# Altium PCB SW3 Jacks.PcbDoc
Units mm, origin at the board's own origin, x right, y up, seen from the top; angles counter-clockwise.
Board outline 19.46 x 86.99 mm, 2 copper layers (Top Layer, Bottom Layer), stack 1.58 mm thick; 14 components, 14 nets, 55 pads, 7 vias.
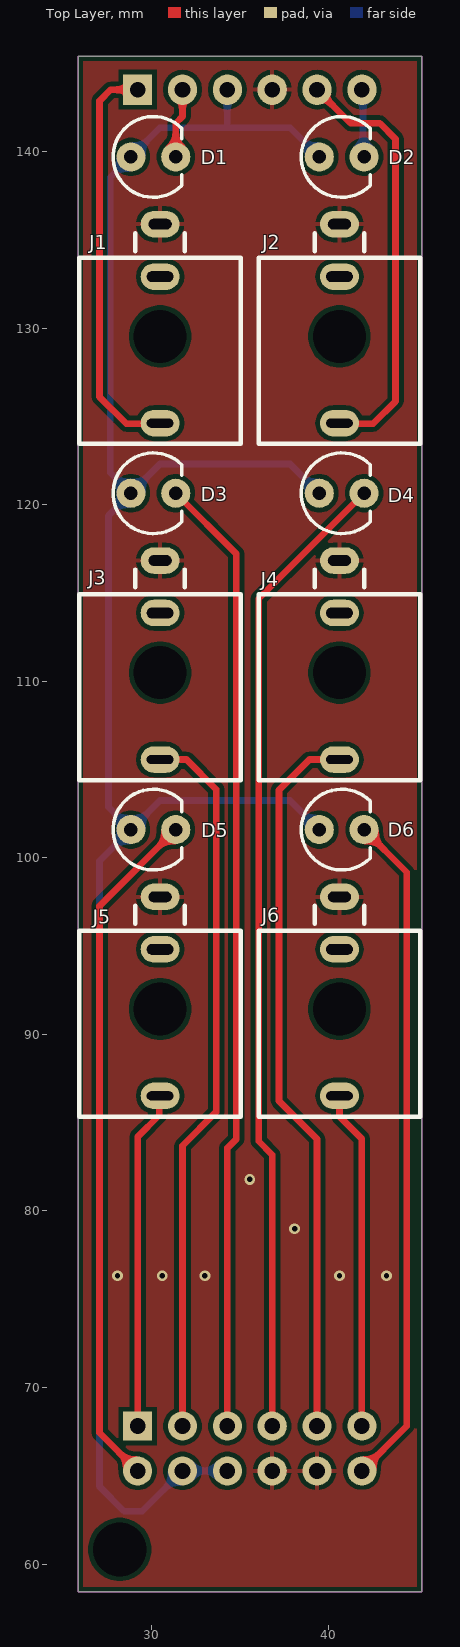
[diagram p0: Top Layer view]
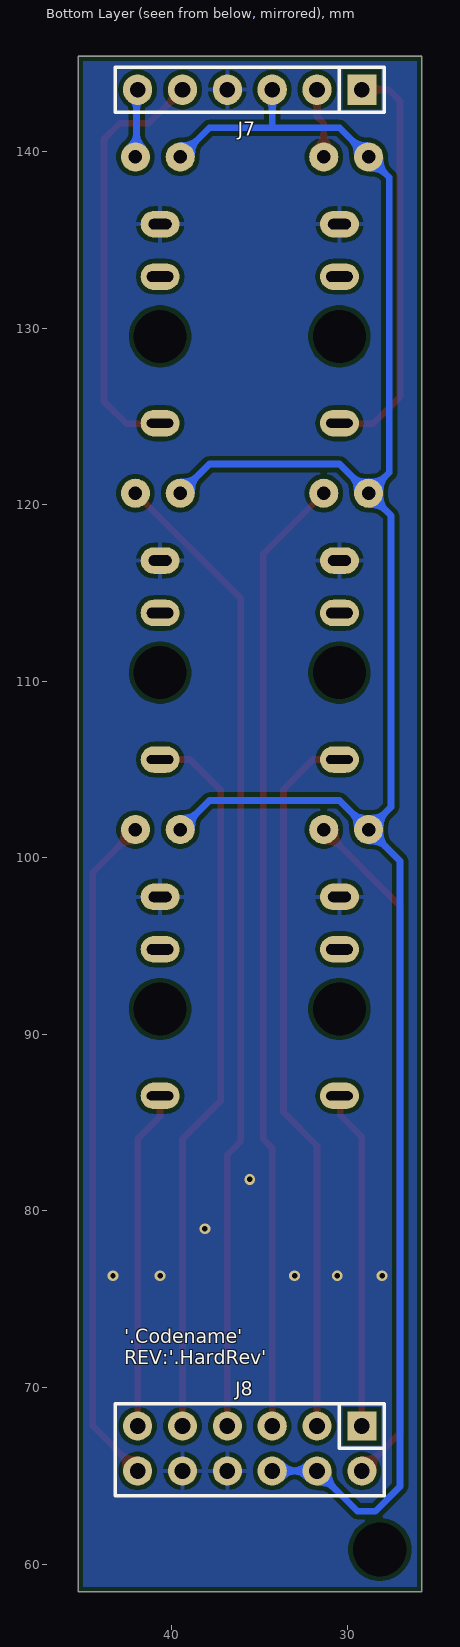
[diagram p1: Bottom Layer view, seen from below]
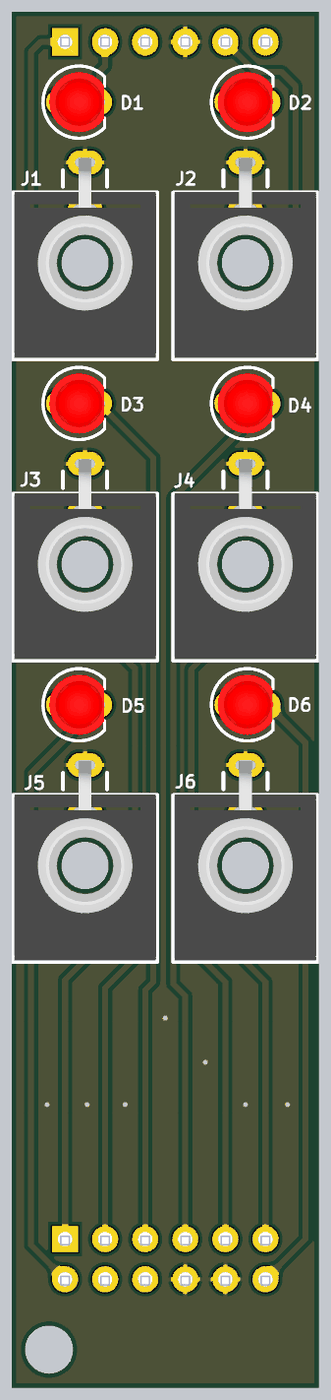
[diagram p2: 3D render of the assembled board from above, using the file's embedded part models]

## Layer stack, top to bottom
Top Solder: solder mask 0.0102, Solder Resist, Dk 3.5
Top Layer: signal copper 0.0356
Dielectric 1: dielectric 1.5086, FR-4, Dk 4.8
Bottom Layer: signal copper 0.0356
Bottom Solder: solder mask 0.0102, Solder Resist, Dk 3.5

## Board outline
25.832,58.42 45.288,58.42 45.288,145.415 25.832,145.415

## Design rules (kind name [scope] priority, off if disabled: settings)
Clearance [All] p1: gap=0.254 ignorepadtopadclearanceinfootprint=FALSE except(0: Arc-Hole Track-Hole SMDPad-Hole THPad-Hole Via-Hole Fill-Hole Poly-Hole Region-Hole Text-Hole)
HoleSize [All] p1: absolutevalues=TRUE maxlimit=2539.975 minlimit=0.025 maxpercent=80.000 minpercent=20.000
PolygonConnect [All] p1: thpad.connectstyle=Relief thpad.reliefconductorwidth=0.254 thpad.reliefentries=4 thpad.polygonreliefangle="90 Angle" thpad.airgapwidth=0.254 smdpad.connectstyle=Relief smdpad.reliefconductorwidth=0.254 smdpad.reliefentries=4 smdpad.polygonreliefangle="90 Angle" smdpad.airgapwidth=0.254 via.connectstyle=Direct via.reliefconductorwidth=0.254 via.reliefentries=4 via.polygonreliefangle="90 Angle" via.airgapwidth=0.254
RoutingVias [All] p1: holewidth=0.711 width=1.27 viastyle="Through Hole" minholewidth=0.711 minwidth=1.27 maxholewidth=0.711 maxwidth=1.27
SilkToSilkClearance [All] p1: silktosilkclearance=0
SilkToSolderMaskClearance [IsPad] p1: minsilkscreentomaskgap=0.025 clearancetoexposedcopper=TRUE
SolderMaskExpansion [All] p1: expansion=0.102 istentingtop=FALSE
Width [All] p1: maxlimit=25.4 minlimit=0.127 preferedwidth=0.254
27 further rules are at their usual default settings.

## Components (designator, comment, footprint, x,y, rotation, side; value= is the part's Value field where it differs from the comment)
D1 "RED" LED_3MM_TH 30.099,139.7 r0 top
D2 "RED" LED_3MM_TH 40.767,139.7 r0 top
D3 "RED" LED_3MM_TH 30.099,120.65 r0 top
D4 "RED" LED_3MM_TH 40.767,120.65 r0 top
D5 "RED" LED_3MM_TH 30.099,101.6 r0 top
D6 "RED" LED_3MM_TH 40.767,101.6 r0 top
J1 "WQP-WQP518MA" PJ301M-12 30.48,129.54 r180 top
J2 "WQP-WQP518MA" PJ301M-12 40.64,129.54 r180 top
J3 "WQP-WQP518MA" PJ301M-12 30.48,110.49 r180 top
J4 "WQP-WQP518MA" PJ301M-12 40.64,110.49 r180 top
J5 "WQP-WQP518MA" PJ301M-12 30.48,91.44 r180 top
J6 "WQP-WQP518MA" PJ301M-12 40.64,91.44 r180 top
J7 "PH1-06-UA" ADAM_TECH_PH1-06-UA 35.56,143.51 r0 bottom
J8 "PH2-12-UA" ADAM_TECH_PH2-12-UA 35.56,66.548 r0 bottom

## Footprints (in the part's own frame and the unit in brackets; to place one, negate y for a bottom-side part, rotate by r counter-clockwise, add the part's x,y. Pads: shape width x height; smd on the part's side, far side on the other; paste and mask are expansions set on the pad)
ADAM_TECH_PH1-06-UA [mil]
  rect 65x68 hole 35: 1(-250,0)
  oval 65x68 hole 35: 2(-150,0) 3(-50,0) 4(50,0) 5(150,0) 6(250,0)
  silkscreen extent -300,-50 300,50, body extent -300,-49 300,49, height 335
ADAM_TECH_PH2-12-UA [mil]
  rect 65x65 hole 35: 1(-250,-50)
  round 65 hole 35: 2(-250,50) 3(-150,-50) 4(-150,50) 5(-50,-50) 6(-50,50) 7(50,-50) 8(50,50) 9(150,-50) 10(150,50) 11(250,-50) 12(250,50)
  silkscreen extent -300,-100 300,105, body extent -300,-95 300,102, height 334
LED_3MM_TH [mil]
  round 65 hole 30: 1(-50,0) 2(50,0)
  silkscreen extent -90,-90 64,90, body extent -75,-75 63,75, height 316
PJ301M-12 [mm] "Moddeled after QingPu WQP-WQP518MA"
  round 0.025 hole 3 unplated: 0(0,0)
  oval 2.2x1.5 hole 0.6 slot 1.3 at 0 deg: 1(0,-6.35)
  oval 2.2x1.5 hole 0.6 slot 1.5 at 0 deg: 2(0,-3.38)
  oval 2.2x1.5 hole 0.5 slot 1.5 at 0 deg: 3(0,4.92)
  silkscreen extent -4.57,-5.84 4.57,6.1, body extent -4.5,-6.62 4.5,6.01, height 14.52

## Part data
D1 D2 D3 D4 D5 D6: library part 151033RS03000, "LED RED CLEAR 3MM ROUND T/H", Color=Red, Manufacturer="Würth Elektronik", Supplier Part Number 1=732-5013-ND, Datasheets=https://www.we-online.com/katalog/datasheet/151033RS03000.pdf, Manufacturer Part Number=151033RS03000, PartNumber=151033RS03000, Supplier 1=Digi-Key, Supplier 2=Mouser, Supplier Part Number 2=710-151033RS03000
J1 J2 J3 J4 J5 J6: "CONN 3.5mm VIRTICAL MONO w/ NORMAL", Manufacturer=QingPu, Connector Type="Phone Jack", Gender=Female, HelpURL=http://www.qingpu-electronics.com/en/products/WQP-PJ398SM-362.html, Manufacturer Part Number=WQP-WQP518MA, PartNumber=WQP-WQP518MA, Signal Lines=Mono, Supplier 1=QingPu, Supplier Part Number 1=WQP-WQP518MA
J7: "CONN HEADER VERT 6POS 2.54MM", Manufacturer="Adam Tech", Supplier Part Number 1=2057-PH1-06-UA-ND, HelpURL=https://app.adam-tech.com/products/download/data_sheet/201605/ph1-xx-ua-data-sheet.pdf, Manufacturer Part Number=PH1-06-UA, PartNumber=PH1-06-UA, Supplier 1=Digi-Key, Supplier 2=Mouser
J8: "CONN HEADER 12POS DUAL VERT PCB", Manufacturer="Adam Tech", Supplier Part Number 1=2057-PH2-12-UA-ND, HelpURL=https://app.adam-tech.com/products/download/data_sheet/202065/ph2-xx-ua-data-sheet.pdf, Manufacturer Part Number=PH2-12-UA, PartNumber=PH2-12-UA, Supplier 1=Digi-Key, Supplier 2=Mouser

## Free pads (board coordinates)
  round 1.524 hole 3.048 unplated: 0(28.194,60.833)

## Via types
v1: diameter 0.61, hole 0.305, Top Layer to Bottom Layer, tented both sides, 7 vias

## Nets (pads, with @x,y where several pads share a name; then routed paths per layer and width w, separated by ;. In a path a pad name is that pad's centre, name@x,y a point inside that pad or via, vN(x,y) a via of type N, cw(c..) or ccw(c..) an arc to the next point about the centre after c; other vN are vias at no path point)
+12V: D1.1 D2.1 D3.1 D4.1 D5.1 D6.1 J7.3 J8.4 J8.6 | length 125.2
  Bottom Layer w0.381: J8.6 J8.4 29.464,62.992 28.448,62.992 27.051,64.389 27.051,99.822 D5.1 ; J7.3 34.29,141.478 34.163,141.351 ; D6.1 37.846,103.251 30.48,103.251 D5.1 ; D4.1 37.846,122.301 30.48,122.301 D3.1 ; D2.1 37.846,141.351 34.163,141.351 ; D5.1 27.559,102.87 27.559,119.38 D3.1 ; D3.1 27.661,121.818 27.661,138.532 D1.1 30.48,141.351 34.163,141.351
GND: J1.1 J2.1 J3.1 J4.1 J5.1 J6.1 J7.4 J8.8 J8.10
  other v1: 28.067,76.327 30.607,76.327 33.02,76.327 40.64,76.327 43.307,76.327 38.1,78.994 35.56,81.788
LED1: D1.2 J7.2 | length 4
  Top Layer w0.381: D1.2 31.369,141.605 31.75,141.986 J7.2
LED2: D2.2 J7.6 | length 3.9
  Bottom Layer w0.381: J7.6 41.974,143.446 41.974,139.763 D2.2
LED3: D3.2 J8.5 | length 54.5
  Top Layer w0.381: D3.2 34.798,117.221 34.798,84.074 34.29,83.566 J8.5
LED4: D4.2 J8.7 | length 55.6
  Top Layer w0.381: J8.7 36.83,83.185 36.068,83.947 36.068,114.681 D4.2
LED5: D5.2 J8.2 | length 39
  Top Layer w0.381: J8.2 27.051,67.437 27.051,97.282 D5.2
LED6: D6.2 J8.12 | length 38.4
  Top Layer w0.381: J8.12 44.45,67.818 44.45,99.187 D6.2
OUT_A_LTCH: J2.3 J7.5 | length 24.2
  Top Layer w0.381: J7.5 41.275,141.605 42.926,141.605 43.815,140.716 43.815,125.857 42.545,124.587 J2.3@40.64,124.587
OUT_A_MOM: J1.3 J7.1 | length 23.2
  Top Layer w0.381: J7.1 27.686,143.51 27.051,142.875 27.051,126.111 28.575,124.587 J1.3@30.48,124.587
OUT_B_LTCH: J4.3 J8.9 | length 41.1
  Top Layer w0.381: J8.9 39.37,84.074 37.211,86.233 37.211,103.841 38.94,105.57 J4.3
OUT_B_MOM: J3.3 J8.3 | length 40.7
  Top Layer w0.381: J3.3 31.971,105.57 33.655,103.886 33.655,85.598 31.75,83.693 J8.3
OUT_C_LTCH: J6.3 J8.11 | length 19.2
  Top Layer w0.381: J6.3 40.64,85.344 41.91,84.074 J8.11
OUT_C_MOM: J5.3 J8.1 | length 19.2
  Top Layer w0.381: J8.1 29.21,84.201 30.431,85.422 30.431,86.471 J5.3
pads on no net: J1.0 J1.2 J2.0 J2.2 J3.0 J3.2 J4.0 J4.2 J5.0 J5.2 J6.0 J6.2

## Polygon pours and split planes (outlines as drawn)
GND on Bottom Layer "GND_L02_P000" (solid, pour order 0): 25.832,145.415 45.288,145.415 45.288,58.42 25.832,58.42
GND on Top Layer "GND_L01_P001" (solid, pour order 1): 25.832,145.415 45.288,145.415 45.288,58.42 25.832,58.42

## Keep-outs
Keep-Out Layer:
  the board outline again, w0.05

## Silkscreen, mask and mechanical layers (free items; w line width, h text height)
Bottom Overlay:
  text "'.Codename'  / REV:'.HardRev'" at 42.672,71.323 h0.79
Bottom Solder:
  text "é" at 37.737,74.822 h16.51
Mechanical 1:
  the board outline again, w0.05
Mechanical 2:
  lines w0.05: 25.832,38.735 25.832,145.415 45.288,145.415 45.288,38.735 ; 25.832,58.42 45.288,58.42 ; 25.4,25.4 25.4,158.75 45.72,158.75 45.72,25.4 25.4,25.4 ; 25.578,27.432 45.542,27.432 45.542,155.956 25.578,155.956 25.578,27.432